# Altium PCB PCB1.PcbDoc (part 1 of 2)
Units mil, origin at the board's own origin, x right, y up, seen from the top; angles counter-clockwise.
Board outline 3040.49 x 3282.62 mil, 2 copper layers (Top Layer, Bottom Layer); 59 components, 123 nets, 376 pads, 176 vias.
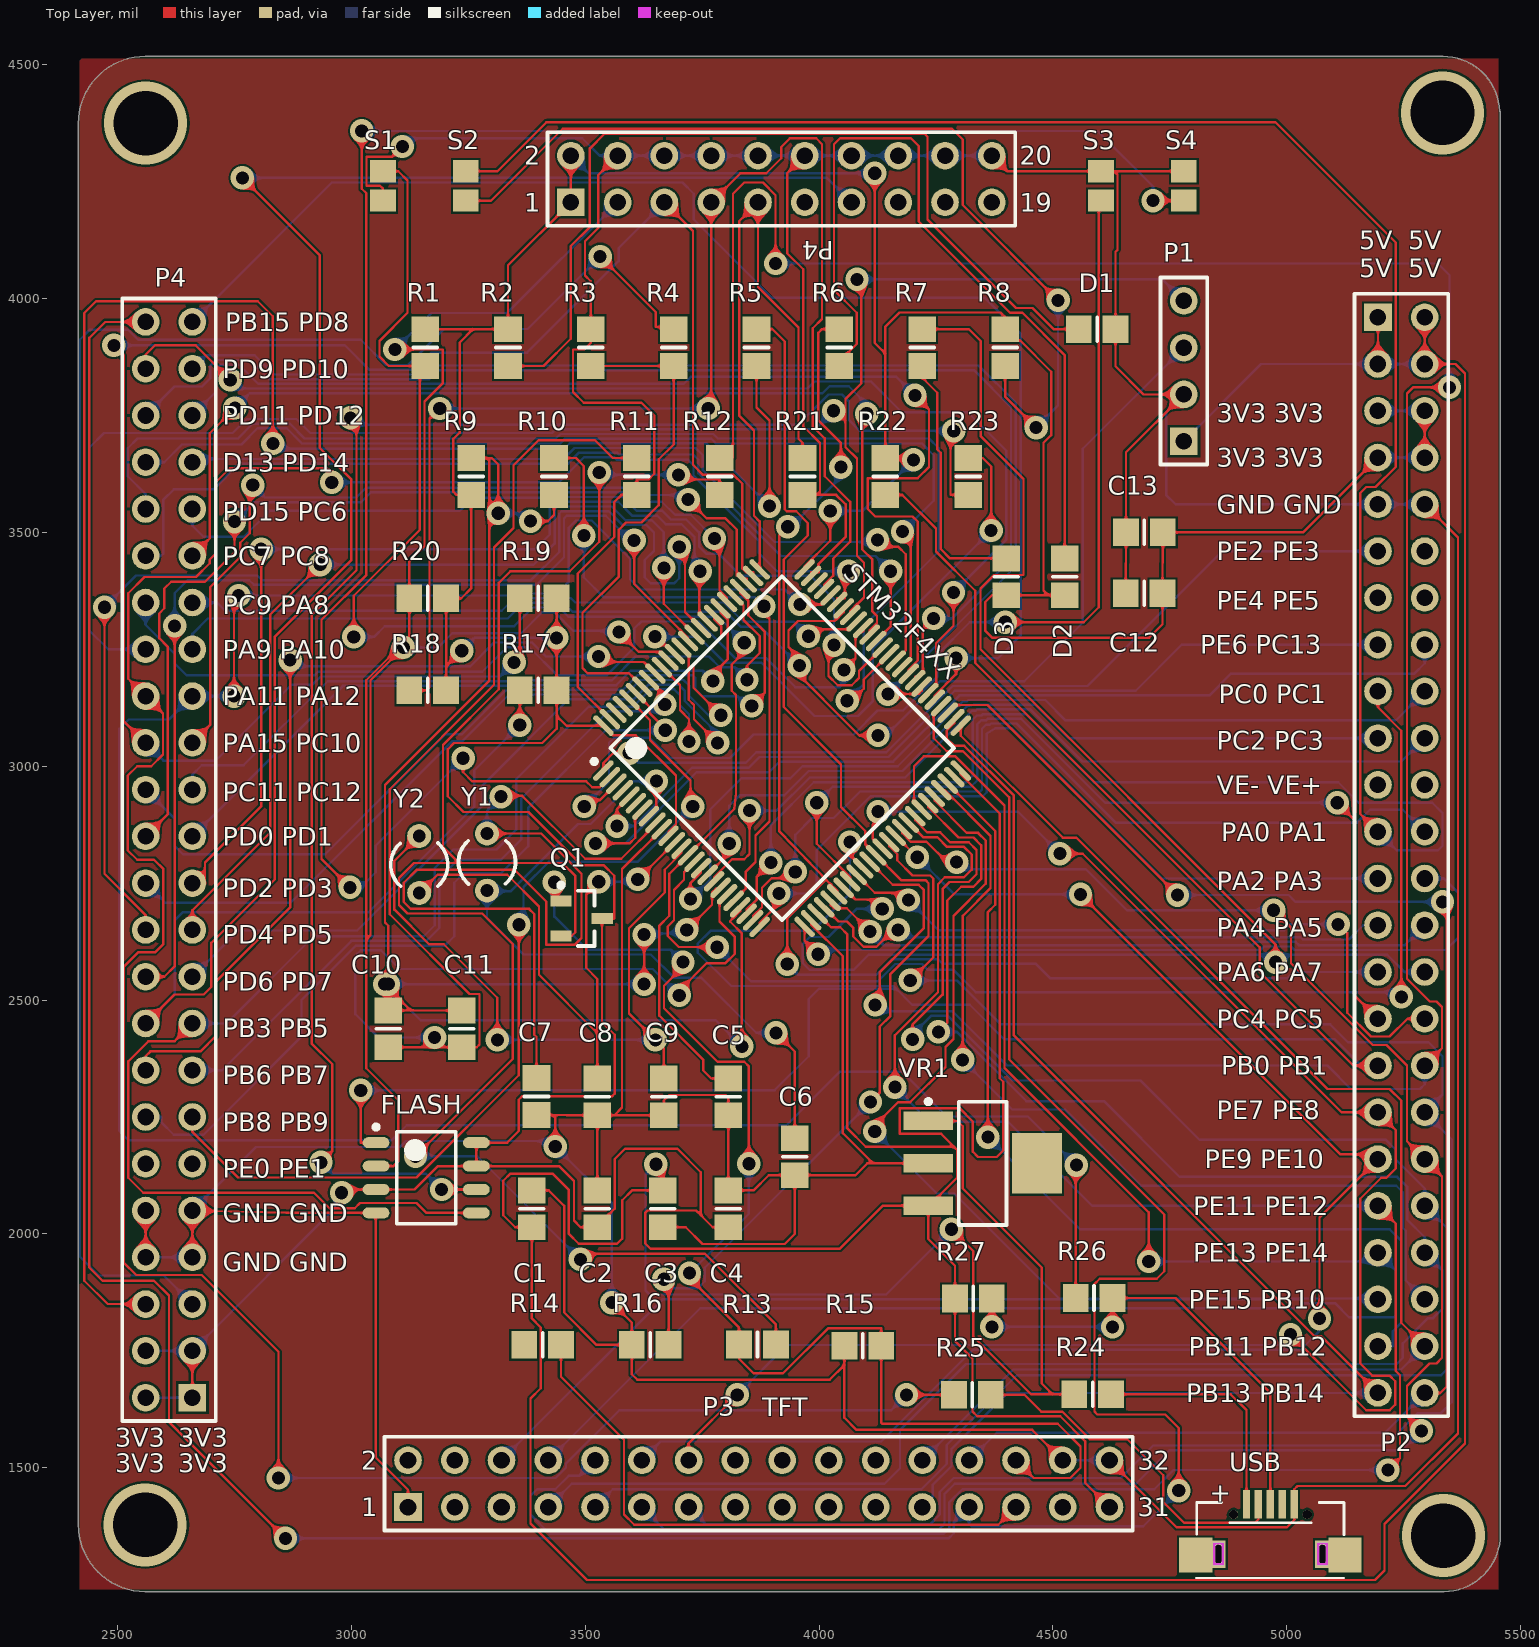
[diagram p0: Top Layer view]
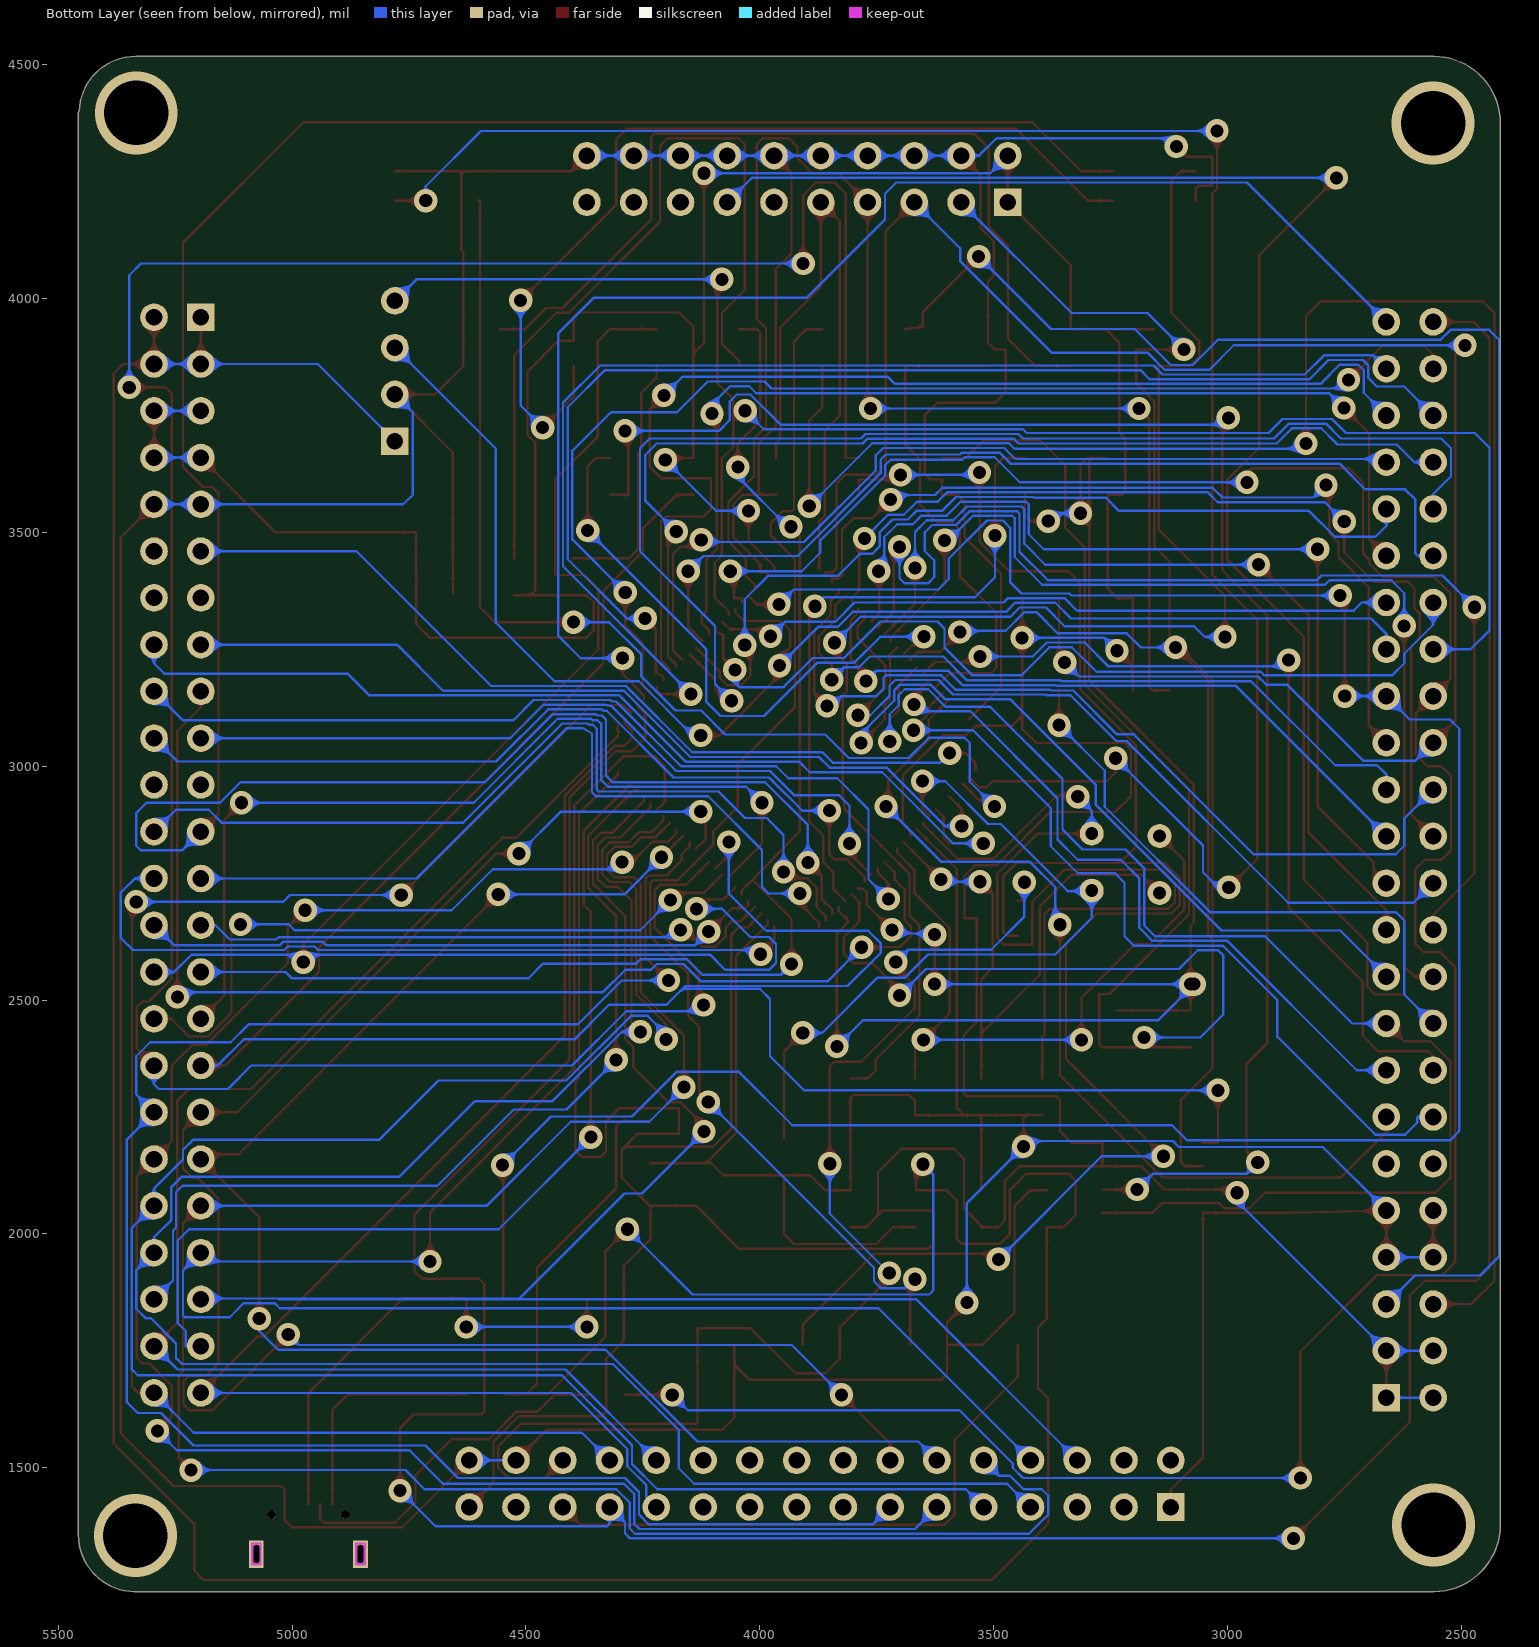
[diagram p1: Bottom Layer view, seen from below]

## Layer stack, top to bottom
Top Solder: solder mask 0.4, Solder Resist, Dk 3.5
Top Layer: signal copper 1.4
Dielectric 1: dielectric 12.6, FR-4, Dk 4.8
Bottom Layer: signal copper 1.4
Bottom Solder: solder mask 0.4, Solder Resist, Dk 3.5

## Board outline
2416.27,1377.95 ccw(c2559.06,1377.95) 2558.97,1235.17 ccw(c2559.06,1377.95) 2559.06,1235.17 2559.06,1235.16 5336,1235.16 ccw(c5336,1240.18) 5336.27,1235.17 ccw(c5335,1356.92) 5456.76,1356.92 ccw(c5451.74,1356.92) 5456.76,1356.96 ccw(c5451.74,1357) 5456.76,1357 5456.76,4397 ccw(c5451.74,4397) 5454.98,4400.83 ccw(c5334.26,4397) 5334.26,4517.79 ccw(c5334.26,4512.77) 5334.22,4517.79 2559.06,4517.79 cw(c2559.06,4512.77) 2559.09,4517.79 2559.06,4517.79 ccw(c2559.06,4375) 2416.27,4375 ccw(c2421.28,4375) 2416.27,4374.9

## Design rules (kind name [scope] priority, off if disabled: settings)
Clearance [All] p1: gap=5
PolygonConnect [All] p1: connectstyle=Relief reliefconductorwidth=10 reliefentries=4 polygonreliefangle="90 Angle" airgapwidth=10
RoutingVias [All] p1: holewidth=28 width=50 viastyle="Through Hole" minholewidth=28 minwidth=50 maxholewidth=28 maxwidth=50
ShortCircuit [All] p1: allowed=TRUE
SolderMaskExpansion [All] p1: expansion=4
Width [All] p1: maxlimit=6 minlimit=4 preferedwidth=5
29 further rules are at their usual default settings.

## Components (designator, comment, footprint, x,y, rotation, side; value= is the part's Value field where it differs from the comment)
C1 "Cap Pol2" 6-0805_M 3385.91,2053.74 r90 top
C2 "Cap Pol2" 6-0805_M 3525.91,2053.74 r90 top
C3 "Cap" 6-0805_M 3665.91,2053.74 r90 top
C4 "Cap" 6-0805_M 3805.91,2053.74 r90 top
C5 "Cap" 6-0805_M 3806,2293 r90 top
C6 "Cap" 6-0805_M 3948,2165 r90 top
C7 "Cap" 6-0805_M 3395.91,2293.74 r90 top
C8 "Cap" 6-0805_M 3525.91,2293.11 r90 top
C9 "Cap" 6-0805_M 3668,2293 r90 top
C10 "Cap" 6-0805_M 3078.86,2438.5 r90 top
C11 "Cap" 6-0805_M 3236.34,2438.5 r90 top
C12 "Cap" 6-0805_M 4695,3370 r0 top
C13 "Cap" 6-0805_M 4695.63,3500 r0 top
D1 "LED" 6-0805_M 4594.61,3934.57 r0 top
D2 "LED" 6-0805_M 4525,3405 r90 top
D3 "LED" 6-0805_M 4400,3405 r90 top
FLASH "Component2" W25Q16 3160,2120 r0 top (schematic designator W25Q16)
P1 "ISP_COM" HDR1X4 4780,3695 r90 top
P2 "Header 24X2" HDR2X24 5195,3960 r270 top
P3 "Header 16X2" HDR2X16 3121,1416 r0 top
P4 "Header 24X2" HDR2X24 2660,1650 r90 top
P4 "Header 10X2" HDR2X10 3469.37,4205.59 r0 top
Q1 "PNP" SOT-23B_N 3492.24,2674.72 r0 top
R1 "Res2" 6-0805_M 3157.6,3895.2 r90 top
R2 "Res2" 6-0805_M 3334.76,3895.2 r90 top
R3 "Res2" 6-0805_M 3511.93,3895.2 r90 top
R4 "Res2" 6-0805_M 3689.09,3895.2 r90 top
R5 "Res2" 6-0805_M 3866.26,3895.2 r90 top
R6 "Res2" 6-0805_M 4043.43,3895.2 r90 top
R7 "Res2" 6-0805_M 4220.59,3895.2 r90 top
R8 "Res2" 6-0805_M 4397.76,3895.2 r90 top
R9 "Res2" 6-0805_M 3256.02,3619.61 r90 top
R10 "Res2" 6-0805_M 3433.19,3619.61 r90 top
R11 "Res2" 6-0805_M 3610.35,3619.61 r90 top
R12 "Res2" 6-0805_M 3787.52,3619.61 r90 top
R13 "Res2" 6-0805_M 3868.26,1763.65 r0 top
R14 "Res2" 6-0805_M 3408.91,1762.74 r0 top
R15 "Res2" 6-0805_M 4093.54,1760.74 r0 top
R16 "Res2" 6-0805_M 3638.91,1762.74 r0 top
R17 "Res2" 6-0805_M 3399.45,3162.17 r0 top
R18 "Res2" 6-0805_M 3163.23,3162.17 r0 top
R19 "Res2" 6-0805_M 3399.45,3359.02 r0 top
R20 "Res2" 6-0805_M 3163.23,3359.02 r0 top
R21 "Res2" 6-0805_M 3964.68,3619.61 r90 top
R22 "Res2" 6-0805_M 4141.85,3619.61 r90 top
R23 "Res2" 6-0805_M 4319.02,3619.61 r90 top
R24 "Res2" 6-0805_M 4585,1657 r0 top
R25 "Res2" 6-0805_M 4327.63,1656 r0 top
R26 "Res2" 6-0805_M 4588,1863 r0 top
R27 "Res2" 6-0805_M 4330,1862 r0 top
S1 "SW-PB" 2029 3067.32,4240.75 r90 top
S2 "SW-PB" 2029 3244.49,4240.75 r90 top
S3 "SW-PB" 2029 4602.76,4240.75 r90 top
S4 "SW-PB" 2029 4779.92,4240.75 r90 top
STM32F4XX "Component1" STM32F4XX 3920.91,3038.74 r45 top
USB "Component_1" USB 4960,1380 r0 top
VR1 "AMS1117-3.3V" SOT223_M 4349.72,2151 r0 top
Y1 "XTAL" R38 3290,2795 r0 top
Y2 "XTAL" R38 3145,2790 r0 top

## Footprints (in the part's own frame and the unit in brackets; to place one, negate y for a bottom-side part, rotate by r counter-clockwise, add the part's x,y. Pads: shape width x height; smd on the part's side, far side on the other; paste and mask are expansions set on the pad)
6-0805_M [mm] "Chip Resistor, Body 2.0x1.2mm, IPC Low Density"
  rect 1.4x1.5 smd: 1(-1,0) 2(1,0)
  silkscreen extent 0,-0.65 0,0.65, body extent -1.07,-0.7 1.07,0.7, height 0.7
2029 [mm] "Chip Inductor, Body 2.0x1.2mm, IPC High Density"
  rect 1.2x1.4 smd: 1(-0.8,0) 2(0.8,0)
  body extent -1.1,-0.7 1.1,0.7, height 0.55
HDR1X4 [mm] "Connector; Header; 4 Position"
  rect 1.5x1.5 hole 0.9: 1(0,0)
  round 1.5 hole 0.9: 2(2.54,0) 3(5.08,0) 4(7.62,0)
  silkscreen extent -1.27,-1.27 8.89,1.27
HDR2X10 [mm] "Connector; Header; 10x2 Position"
  rect 1.5x1.5 hole 0.9: 1(0,0)
  round 1.5 hole 0.9: 2(0,2.54) 3(2.54,0) 4(2.54,2.54) 5(5.08,0) 6(5.08,2.54) 7(7.62,0) 8(7.62,2.54) 9(10.16,0) 10(10.16,2.54) 11(12.7,0) 12(12.7,2.54) 13(15.24,0) 14(15.24,2.54) 15(17.78,0) 16(17.78,2.54) 17(20.32,0) 18(20.32,2.54) 19(22.86,0) 20(22.86,2.54)
  silkscreen extent -1.27,-1.27 24.13,3.81
HDR2X16 [mm] "Connector; Header; 16x2 Position"
  rect 1.5x1.5 hole 0.9: 1(0,0)
  round 1.5 hole 0.9: 2(0,2.54) 3(2.54,0) 4(2.54,2.54) 5(5.08,0) 6(5.08,2.54) 7(7.62,0) 8(7.62,2.54) 9(10.16,0) 10(10.16,2.54) 11(12.7,0) 12(12.7,2.54) 13(15.24,0) 14(15.24,2.54) 15(17.78,0) 16(17.78,2.54) 17(20.32,0) 18(20.32,2.54) 19(22.86,0) 20(22.86,2.54) 21(25.4,0) 22(25.4,2.54) 23(27.94,0) 24(27.94,2.54) 25(30.48,0) 26(30.48,2.54) 27(33.02,0) 28(33.02,2.54) 29(35.56,0) 30(35.56,2.54) 31(38.1,0) 32(38.1,2.54)
  silkscreen extent -1.27,-1.27 39.37,3.81
HDR2X24 [mm] "Connector; Header; 24x2 Position"
  rect 1.5x1.5 hole 0.9: 1(0,0)
  round 1.5 hole 0.9: 2(0,2.54) 3(2.54,0) 4(2.54,2.54) 5(5.08,0) 6(5.08,2.54) 7(7.62,0) 8(7.62,2.54) 9(10.16,0) 10(10.16,2.54) 11(12.7,0) 12(12.7,2.54) 13(15.24,0) 14(15.24,2.54) 15(17.78,0) 16(17.78,2.54) 17(20.32,0) 18(20.32,2.54) 19(22.86,0) 20(22.86,2.54) 21(25.4,0) 22(25.4,2.54) 23(27.94,0) 24(27.94,2.54) 25(30.48,0) 26(30.48,2.54) 27(33.02,0) 28(33.02,2.54) 29(35.56,0) 30(35.56,2.54) 31(38.1,0) 32(38.1,2.54) 33(40.64,0) 34(40.64,2.54) 35(43.18,0) 36(43.18,2.54) 37(45.72,0) 38(45.72,2.54) 39(48.26,0) 40(48.26,2.54) 41(50.8,0) 42(50.8,2.54) 43(53.34,0) 44(53.34,2.54) 45(55.88,0) 46(55.88,2.54) 47(58.42,0) 48(58.42,2.54)
  silkscreen extent -1.27,-1.27 59.69,3.81
R38 [mm] "Crystal, Thru-Hole; 2 Leads; Body 3.1 x 8.2 mm (Dia.xH)"
  round 1.3 hole 0.7: 1(0,1.55) 2(0,-1.55)
  silkscreen extent -1.55,-1.19 1.55,1.17
SOT223_M [mm] "SOT223, 4-Leads, Body 6.5x3.5mm, Pitch 2.3mm, Lead Span 7mm, IPC Low Density"
  rect 2.7x1 smd: 1(-2.95,2.3) 2(-2.95,0) 3(-2.95,-2.3)
  rect 2.7x3.3 smd: 4(2.95,0)
  silkscreen extent -3.07,-3.35 1.3,3.47, body extent -1.85,-3.35 1.85,3.35, height 1.7
SOT-23B_N [mm] "SOT23, 3-Leads, Body 2.9x1.3mm, Pitch 0.95mm, Lead Span 2.4mm, IPC Medium Density"
  rect 1.15x0.6 smd: 1(-1.125,0.95) 2(-1.125,-0.95) 3(1.125,0)
  silkscreen extent -1.25,-1.5 0.7,1.92, body extent -0.7,-1.5 0.7,1.5, height 1.14
STM32F4XX [mm] "TSQFP, 100-Leads, Body 14.00x14.00mm, Pitch 0.50mm, IPC Medium Density"
  oval 1.45x0.3 smd: 1(-7.725,6) 2(-7.725,5.5) 3(-7.725,5) 4(-7.725,4.5) 5(-7.725,4) 6(-7.725,3.5) 7(-7.725,3) 8(-7.725,2.5) 9(-7.725,2) 10(-7.725,1.5) 11(-7.725,1) 12(-7.725,0.5) 13(-7.725,0) 14(-7.725,-0.5) 15(-7.725,-1) 16(-7.725,-1.5) 17(-7.725,-2) 18(-7.725,-2.5) 19(-7.725,-3) 20(-7.725,-3.5) 21(-7.725,-4) 22(-7.725,-4.5) 23(-7.725,-5) 24(-7.725,-5.5) 25(-7.725,-6) 51(7.725,-6) 52(7.725,-5.5) 53(7.725,-5) 54(7.725,-4.5) 55(7.725,-4) 56(7.725,-3.5) 57(7.725,-3) 58(7.725,-2.5) 59(7.725,-2) 60(7.725,-1.5) 61(7.725,-1) 62(7.725,-0.5) 63(7.725,0) 64(7.725,0.5) 65(7.725,1) 66(7.725,1.5) 67(7.725,2) 68(7.725,2.5) 69(7.725,3) 70(7.725,3.5) 71(7.725,4) 72(7.725,4.5) 73(7.725,5) 74(7.725,5.5) 75(7.725,6)
  oval 0.3x1.45 smd: 26(-6,-7.725) 27(-5.5,-7.725) 28(-5,-7.725) 29(-4.5,-7.725) 30(-4,-7.725) 31(-3.5,-7.725) 32(-3,-7.725) 33(-2.5,-7.725) 34(-2,-7.725) 35(-1.5,-7.725) 36(-1,-7.725) 37(-0.5,-7.725) 38(0,-7.725) 39(0.5,-7.725) 40(1,-7.725) 41(1.5,-7.725) 42(2,-7.725) 43(2.5,-7.725) 44(3,-7.725) 45(3.5,-7.725) 46(4,-7.725) 47(4.5,-7.725) 48(5,-7.725) 49(5.5,-7.725) 50(6,-7.725) 76(6,7.725) 77(5.5,7.725) 78(5,7.725) 79(4.5,7.725) 80(4,7.725) 81(3.5,7.725) 82(3,7.725) 83(2.5,7.725) 84(2,7.725) 85(1.5,7.725) 86(1,7.725) 87(0.5,7.725) 88(0,7.725) 89(-0.5,7.725) 90(-1,7.725) 91(-1.5,7.725) 92(-2,7.725) 93(-2.5,7.725) 94(-3,7.725) 95(-3.5,7.725) 96(-4,7.725) 97(-4.5,7.725) 98(-5,7.725) 99(-5.5,7.725) 100(-6,7.725)
  silkscreen extent -7.85,-6.6 6.6,6.82, body extent -7,-7 7,7, height 1.6
USB [mm]
  rect 0.4x1.55 smd: 1(-1.173,1.057) 2(-0.523,1.057) 3(0.127,1.057) 4(0.777,1.057) 5(1.427,1.057)
  rect 1.8x1.9 smd: 6(-3.923,-1.693) 6(4.177,-1.693)
  rect 0.8x1.5 hole 0.4 slot 1 at 90 deg: 6(-2.698,-1.643) 6(2.952,-1.643)
  round 0.5 hole 0.5 unplated: ""(-1.873,0.507) ""(2.127,0.507)
  Keep-Out Layer lines w0.127: -2.927,-2.186 -2.469,-2.186 -2.469,-1.068 -2.927,-1.068 -2.927,-2.186 ; 2.723,-2.186 3.181,-2.186 3.181,-1.068 2.723,-1.068 2.723,-2.186
  silkscreen extent -3.92,-2.94 4.13,1.16
W25Q16 [mm] "SOIC, 8-Leads, Body 4.90x3.90mm, Pitch 1.27mm, IPC Medium Density"
  oval 1.45x0.6 smd: 1(-2.725,1.905) 2(-2.725,0.635) 3(-2.725,-0.635) 4(-2.725,-1.905) 5(2.725,-1.905) 6(2.725,-0.635) 7(2.725,0.635) 8(2.725,1.905)
  silkscreen extent -2.85,-2.5 1.6,2.88, body extent -2,-2.5 2,2.5, height 1.75

## Part data
C1 C2: "Polarized Capacitor (Axial)"
C3 C4 C5 C6 C7 C8 C9 C10 C11 C12 C13: "Capacitor"
D1 D2 D3: library part LED0, "Typical INFRARED GaAs LED"
P1: library part "Header 4", "Header, 4-Pin"
P2 P4: "Header, 24-Pin, Dual row"
P3: "Header, 16-Pin, Dual row"
P4: "Header, 10-Pin, Dual row"
Q1: "PNP Bipolar Transistor"
R1 R2 R3 R4 R5 R6 R7 R8 R9 R10 R11 R12 R13 R14 R15 R16 R17 R18 R19 R20 R21 R22 R23 R24 R25 R26 R27: "Resistor"
S1 S2 S3 S4: "Switch"
VR1: library part "Volt Reg", "Voltage Regulator"
Y1 Y2: "Crystal Oscillator"

## Via types
v1: diameter 50, hole 28, Top Layer to Bottom Layer, 172 vias
v2: diameter 177.17, hole 137.8, Top Layer to Bottom Layer, 4 vias

## Nets (pads, with @x,y where several pads share a name; then routed paths per layer and width w, separated by ;. In a path a pad name is that pad's centre, name@x,y a point inside that pad or via, vN(x,y) a via of type N, cw(c..) or ccw(c..) an arc to the next point about the centre after c; other vN are vias at no path point)
3V3: C2.1 C4.1 C12.2 C13.2 D2.1 D3.1 FLASH.3 FLASH.7 FLASH.8 P2.5 P2.6 P2.7 P2.8 P3.31 P4.1 P4.2 P4.3@2660,1750 P4.4@2560,1750 Q1.3 R1.2 R2.2 R8.2 R9.1 R17.2 R18.2 R19.2 R20.2 R22.2 R27.1 STM32F4XX.11 STM32F4XX.28 STM32F4XX.50 STM32F4XX.75 STM32F4XX.100 VR1.3 | length 14497.4
  Top Layer w5: P4.1@2660,1650 P4.3@2660,1750 ; v1(2979,2088) 2986,2095 FLASH.3@3052.72,2095 3135,2095 3185,2145 FLASH.7@3267.28,2145 ; R1.2@3157.6,3934.57 3260,3934.57 ; R18.2@3202.6,3162.17 3202.6,3213.6 ; v1(3236,3247) 3202.6,3213.6 ; R19.2@3438.82,3359.02 v1(3438.82,3274.5) R17.2@3438.82,3162.17 3438.82,3107.94 ; P4.2@3469.37,4305.59 P4.1@3469.37,4205.59 3334.76,4070.98 R2.2@3334.76,3934.57 3260,3934.57 ; STM32F4XX.11@3678.01,2851.52 3678.01,2860 3694,2875.99 3694,2980 3608,3066 3559.58,3066 STM32F4XX.100@3538.82,3086.76 3460,3086.76 3438.82,3107.94 ; C4.1@3805.91,2014.37 3772.63,2014.37 3747,2040 ; STM32F4XX.75@3968.93,3420.83 3968.93,3426.93 4024,3482 v1(4024,3546) ; STM32F4XX.28@3996.77,2684.49 4025.67,2655.59 4045.41,2655.59 4060.5,2640.5 4060.5,2225.5 4099.74,2186.26 4288.74,2186.26 ; v1(4119,4268) 4119,3904.85 4141.85,3882 ; v1(4202,3655) 4198.02,3658.98 R22.2@4141.85,3658.98 4141.85,3882 ; STM32F4XX.50@4302.99,2990.72 4302.99,2982.17 4386.5,2898.67 4386.5,2332.81 4394,2325.31 4394,2178.5 4380,2164.5 4340,2164.5 4328.5,2176 4328.5,2240.5 4300,2269 4172.5,2269 4172.5,2214 4261,2214 4288.74,2186.26 ; D2.1@4525,3365.63 4490,3365.63 ; P3.31@4621,1416 4569.31,1467.69 4569.31,1556.39 4515.73,1609.97 4338.03,1609.97 4328,1620 4328,1733.63 4290.63,1771 R27.1@4290.63,1862 4290.63,1932 4233.57,1989.06 VR1.3@4233.57,2060.45 ; P2.7@5195,3660 5035,3500 C13.2@4735,3500 4735,3434.63 4734.37,3434 C12.2@4734.37,3370 4734.37,3303.37 4706,3275 4370,3275 4355,3290 4355,3350.63 4370,3365.63 D3.1@4400,3365.63 4490,3365.63 ; P2.8@5295,3660 P2.6@5295,3760 ; 3202.6,3213.6 R20.2@3202.6,3359.02 3235.04,3359.02 3256.02,3380 R9.1@3256.02,3580.24 3225,3580.24 3218,3587.24 3218,3699.88 3231.5,3713.38 3231.5,3906.07 3260,3934.57 ; FLASH.7@3267.28,2145 3444,2145 3476,2113 3476,2028.37 3490,2014.37 C2.1@3525.91,2014.37 3525.91,2017 3563,2054.09 3563,2160 3585,2182 3697,2182 3747,2132 3747,2040 ; FLASH.7@3267.28,2145 FLASH.8@3267.28,2195 3333,2195 3358,2220 3358,2287 3365,2294 3557,2294 3563,2300 3563,2426 3536,2453 3536,2674.72 Q1.3@3536.54,2674.72 3562,2674.72 3562,2766 3540,2788 3493,2788 3379,2902 3240,2902 3206,2936 3206,3036 3219.5,3049.5 3408.32,3049.5 3438.82,3080 3438.82,3107.94 ; 3747,2040 3737,2050 3633,2050 3628,2045 3628,1980 3640,1968 4044,1968 4136.45,2060.45 VR1.3@4233.57,2060.45 ; 4141.85,3882 4141.85,3940 4171.85,3970 4387.76,3970 4397.76,3960 R8.2@4397.76,3934.57 4397.76,3910 4430,3910 4496.5,3843.5 4496.5,3708 4480,3691.5 4480,3375.63 4490,3365.63 ; VR1.3@4233.57,2060.45 4235.45,2060.45 4295,2120 4295,2180 4288.74,2186.26
  Bottom Layer w5: P4.2@2560,1650 P4.1@2660,1650 ; P4.4@2560,1750 P4.3@2660,1750 2979,2069 v1(2979,2088) ; v1(3236,3247) 3263.5,3274.5 v1(3438.82,3274.5) ; P4.2@3469.37,4305.59 3506.96,4268 v1(4119,4268) ; v1(4024,3546) 4093,3546 v1(4202,3655) ; P2.7@5195,3660 P2.8@5295,3660 ; P2.5@5195,3760 P2.6@5295,3760
5V: C1.1 C3.2 P1.1 P2.1 P2.2 P2.3 P2.4 R24.1 VR1.1 | length 9052.7
  Top Layer w5: v1(3651,2149) 3665.91,2134.09 C3.2@3665.91,2093.11 3600,2093.11 3579,2072.11 3579,1990 3568,1979 3486,1979 3465,2000 3465,2094 3430,2129 3340,2129 3324.63,2113.63 3324.63,2040 3350.26,2014.37 C1.1@3385.91,2014.37 3385.91,1819.09 3405,1800 3405,1670 3383,1648 3383,1381 3504,1260 5189,1260 5209,1280 5209,1380 5381,1552 5381,3840 5361,3860 P2.4@5295,3860 P2.2@5295,3960 ; VR1.1@4233.57,2241.55 4295.45,2241.55 4307,2230 4307,2097 4476,1928 4476,1680 4499,1657 ; v1(4283,2010) 4330,1963 4330,1780 4453,1657 4499,1657 ; R24.1@4545.63,1657 4499,1657 ; P2.3@5195,3860 P2.1@5195,3960
  Bottom Layer w5: v1(3651,2149) 3629,2127 3629,1879 3637.5,1870.5 4143.5,1870.5 v1(4283,2010) ; P1.1@4780,3695 4945,3860 P2.3@5195,3860 P2.4@5295,3860
BOOT0: R3.1 R4.1 STM32F4XX.94 | length 1067.6
  Top Layer w5: R3.1@3511.93,3855.83 R4.1@3689.09,3855.83 3689.09,3688.09 3657.38,3656.38 3657.38,3558.38 3620,3521 3587.48,3521 3571.98,3505.5 3571.98,3405.98 3494,3328 3494,3210 3505,3199 3593.61,3199 STM32F4XX.94@3622.33,3170.28
EP5: STM32F4XX.4
F_CS: FLASH.1 P2.33 R22.1 STM32F4XX.35 | length 5289.7
  Top Layer w5: v1(3020,2307) 3020,2195 FLASH.1@3052.72,2195 ; v1(4066,2838) 4064.13,2838 4056.13,2830 4056.13,2820 STM32F4XX.35@4094.2,2781.93 ; R22.1@4141.85,3580.24 4177.76,3580.24 4250,3508 4250,3459 4334,3375 4334,3221 4942.35,2612.65 4942.35,2560 5142.35,2360 P2.33@5195,2360
  Bottom Layer w5: v1(3020,2307) 3905,2307 3978,2380 3978,2502 4000,2524 4165,2524 ; v1(4066,2838) 4066,2728 3986,2648 3768,2648 3740.8,2620.8 3740.8,2601.34 3812.14,2530 4159,2530 4165,2524 ; P2.33@5195,2360 5159,2360 5103,2416 4396,2416 4322,2490 4199,2490 4165,2524
FSMC_A18: P3.21
FSMC_D0: P3.18
FSMC_D1: P3.17
FSMC_D2: P3.16
FSMC_D3: P3.15
FSMC_D4: P2.35 P3.14 STM32F4XX.38 | length 3875
  Top Layer w5: P3.14@3721,1516 3721,1552 v1(3825,1656) ; v1(4126,2903) 4126,2886 4115,2875 4115,2844.65 STM32F4XX.38@4135.96,2823.69 ; v1(4515,2813) 4564,2813 5117,2260 P2.35@5195,2260 5233,2222 5233,2140 5213,2120 5202,2120 5157,2075 5157,1723 5182.97,1697.03 5220,1697.03 5232.03,1685 5232.03,1635 5220,1622.97 5170.03,1622.97 v1(5008,1785)
  Bottom Layer w5: v1(3825,1656) 3931.5,1762.5 4985.5,1762.5 v1(5008,1785) ; v1(4126,2903) 4425,2903 v1(4515,2813)
FSMC_D5: P2.36 P3.13 STM32F4XX.39 | length 4145.9
  Top Layer w5: STM32F4XX.39@4149.88,2837.6 4149.88,2828.73 4167,2811.61 4167,2799 4199.5,2766.5 4237.63,2766.5 4244.13,2760 4244.13,2591.13 v1(4195,2542)
  Bottom Layer w5: P3.13@3721,1416 3758.03,1378.97 4237,1378.97 4258.03,1400 4258.03,1448.17 4287.86,1478 4645,1478 4714.56,1547.56 5210.56,1547.56 5280,1617 5330,1617 5353,1640 5353,2202 P2.36@5295,2260 5333,2298 5333,2380 5303,2410 5131,2410 5093,2448 4388.88,2448 4294.88,2542 v1(4195,2542)
FSMC_D6: P2.37 P3.12 STM32F4XX.40 | length 3306.4
  Top Layer w5: STM32F4XX.40@4163.8,2851.52 v1(4210,2805.32) ; v1(4559,2726) 5115,2170 5195,2170 P2.37@5195,2160 5070,2035 v1(5070,1819)
  Bottom Layer w5: P3.12@3621,1516 3661,1556 4133,1556 4329.38,1752.38 5030,1752.38 5070,1792.38 v1(5070,1819) ; v1(4210,2805.32) 4289.32,2726 v1(4559,2726)
FSMC_D7: P2.38 P3.11 STM32F4XX.41 | length 4014.2
  Top Layer w5: STM32F4XX.41@4177.72,2865.44 4177.72,2856.57 4195.79,2838.5 4229.74,2838.5 4273.24,2795 v1(4294,2795) ; v1(4972,2692) 5009,2655 5009,2578.86 5183.86,2404 5213,2404 5257,2360 5257,2198 P2.38@5295,2160 5332.03,2122.97 5332.03,1735.03 5320,1723 5305,1723 5257,1675 5257,1610 v1(5288,1579)
  Bottom Layer w5: P3.11@3621,1416 3668.03,1368.97 4257,1368.97 4268.03,1380 4268.03,1444.03 4290,1466 4677.41,1466 4748.97,1537.56 5246.56,1537.56 v1(5288,1579) ; v1(4294,2795) 4309.46,2779.54 4570.71,2779.54 4658.25,2692 v1(4972,2692)
FSMC_D8: P2.39 P3.10 STM32F4XX.42 | length 4634.2
  Top Layer w5: v1(4162,2314) 4162,2424.5 4254.13,2516.63 4254.13,2747.8 4268.83,2762.5 4310,2762.5 4326.5,2779 4326.5,2811 4310,2827.5 4273.5,2827.5 4252.5,2848.5 4222.5,2848.5 STM32F4XX.42@4191.64,2879.36 ; P2.39@5195,2060 5233,2022 5233,1707.03 5242.03,1698 5242.03,1521.03 v1(5216.06,1495.06)
  Bottom Layer w5: P3.10@3521,1516 3488,1483 3465,1483 3436,1454 3397,1454 3383,1440 3383,1400 3424.03,1358.97 4267,1358.97 4278.03,1370 4278.03,1425.49 4306.54,1454 4716.47,1454 4757.53,1495.06 v1(5216.06,1495.06) ; v1(4162,2314) 4236,2240 4404,2240 4584,2060 P2.39@5195,2060
FSMC_D9: P2.40 P3.9 STM32F4XX.43 | length 4313
  Top Layer w5: v1(4200,2416) 4200,2447.5 4264.13,2511.63 4264.13,2737.8 4278.83,2752.5 4320,2752.5 4336.5,2769 4336.5,2821 4320,2837.5 4280.04,2837.5 4259.04,2858.5 4231.46,2858.5 4205.56,2884.4 STM32F4XX.43@4205.56,2893.28
  Bottom Layer w5: P3.9@3521,1416 3559,1454 4219,1454 4273,1508 4273,1548.46 4422.54,1698 5330,1698 5343,1711 5343,2012 P2.40@5295,2060 5295,2097 5233,2159 5233,2180 5212,2201 4814,2201 4687,2328 4413.61,2328 4275.36,2466.25 4239.25,2466.25 4200,2427 v1(4200,2416)
FSMC_D10: P2.41 P3.8 STM32F4XX.44 | length 4072.2
  Top Layer w5: STM32F4XX.44@4219.48,2907.2 4203,2923.68 4203,3000 4224,3021 4291.67,3021 4396.5,2916.17 4396.5,2354.5 4705,2046 v1(4705,1941)
  Bottom Layer w5: P3.8@3421,1516 3745.89,1840.89 5026.36,1840.89 5037.5,1852.03 5102.97,1852.03 5132.97,1822.03 5229.03,1822.03 5233,1826 5233,1922 P2.41@5195,1960 5195,1941 v1(4705,1941)
FSMC_D11: P2.42 P3.7 STM32F4XX.45 | length 4193.2
  Top Layer w5: STM32F4XX.45@4233.4,2921.12 4233.4,2912.25 4298.14,2847.5 4330,2847.5 4346.5,2831 4346.5,2759 4330,2742.5 4303.83,2742.5 4274.13,2712.8 4274.13,2451.13 v1(4255,2432)
  Bottom Layer w5: P3.7@3421,1416 3471,1466 4140,1466 4173,1499 4173,1581 4314,1722 5235,1722 5248,1735 5248,1766 5302,1820 5313,1820 5333,1840 5333,1922 P2.42@5295,1960 5295,1993 5257.97,2030.03 5257.97,2100 5235.97,2122 4771,2122 4609,2284 4443,2284 4295,2432 v1(4255,2432)
FSMC_D12: P2.43 P3.6 STM32F4XX.46 | length 3965.8
  Top Layer w5: v1(4119,2219) 4119,2231.5 4169,2281.5 4194.71,2281.5 4270.25,2357.04 4270.25,2399.5 4287.5,2416.75 4287.5,2680 4356.5,2749 4356.5,2841 4340,2857.5 4315.98,2857.5 4247.32,2926.16 STM32F4XX.46@4247.32,2935.04
  Bottom Layer w5: P3.6@3321,1516 3665,1860 5027.97,1860 5030,1862.03 ; v1(4119,2219) 4251.48,2086.52 4289.24,2086.52 4513.73,1862.03 5030,1862.03 ; P2.43@5195,1860 5192.97,1862.03 5030,1862.03
FSMC_D13: P3.5
FSMC_D14: P3.4
FSMC_D15: P3.3
FSMC_NE1: P3.22
FSMC_NOE: P3.19
FSMC_NWE: P3.20
GND: C1.2 C2.2 C3.1 C4.2 C5.1 C6.1 C7.1 C8.1 C9.1 C12.1 C13.1 D1.2 FLASH.4 P1.2 P2.9 P2.10 P3.1 P3.30 P3.32 P4.4@3569.37,4305.59 P4.6@3669.37,4305.59 P4.7@2660,1950 P4.8 P4.9@2660,2050 P4.10 P4.12@3969.37,4305.59 P4.14@4069.37,4305.59 P4.16@4169.37,4305.59 P4.18@4269.37,4305.59 P4.20@4369.37,4305.59 R3.2 R11.1 R15.1 R16.1 R21.1 S1.1 S3.2 S4.2 STM32F4XX.10 STM32F4XX.27 STM32F4XX.74 STM32F4XX.99 USB.5 VR1.2 | length 16818.6
  Top Layer w5: P4.8@2560,1950 P4.10@2560,2050 ; P4.7@2660,1950 P4.9@2660,2050 2861,2045 FLASH.4@3052,2045 ; FLASH.4@3052.72,2045 FLASH.4@3052,2045 ; S1.1@3067.32,4209.25 3067.32,4235 3061.2,4241.12 3032.26,4241.12 3032.26,4303.37 3087.37,4303.37 v1(3109,4325) ; P3.1@3121,1416 3121,1453 3052,1522 FLASH.4@3052,2045 ; C1.2@3385.91,2093.11 3421.89,2093.11 3455,2060 3455,1832 3524.26,1762.74 R16.1@3599.54,1762.74 ; C7.1@3395.91,2254.37 3430,2254.37 ; v1(3436,2187) 3436,2248.37 3430,2254.37 ; C2.2@3525.91,2093.11 C8.1@3525.91,2253.74 ; STM32F4XX.99@3552.74,3100.68 3484,3169.42 3484,3412 3561.98,3489.98 3561.98,3564.98 3577.24,3580.24 R11.1@3610.35,3580.24 3610.35,3613 3635,3613 3647.38,3625.38 3647.38,3749.62 3620,3777 3497,3777 3474,3800 3474,3891 3497.93,3891 3511.93,3905 R3.2@3511.93,3934.57 3511.93,4036.87 3499.4,4049.4 3499.4,4122.53 3528,4151.13 3528,4264.22 P4.4@3569.37,4305.59 ; v1(3557,1853) 3599.54,1810.46 R16.1@3599.54,1762.74 ; STM32F4XX.10@3664.09,2865.44 3578.75,2780.1 3578.75,2270 3562.49,2253.74 C8.1@3525.91,2253.74 ; C3.1@3665.91,2014.37 3715,2014.37 3750.87,1978.5 3926.5,1978.5 3948,2000 C6.1@3948,2125.63 ; R21.1@3964.69,3580.24 3995,3580.24 ; P4.12@3969.37,4305.59 3932,4268.22 3932,4096.5 3966,4062.5 3966,3727 4002,3691 4002,3587.24 3995,3580.24 ; STM32F4XX.27@3982.85,2670.57 3982.85,2661.7 4050.5,2594.04 4050.5,2215.5 4115,2151 ; STM32F4XX.74@3982.85,3406.91 3982.85,3415 3999,3415 3999,3432.5 4056.71,3490.21 4056.71,3560 4036.48,3580.24 3995,3580.24 ; R15.1@4054.17,1760.74 4054.17,1720 ; VR1.2@4233.57,2151 4115,2151 ; P4.20@4369.37,4305.59 4402.72,4272.24 S3.2@4602.76,4272.24 4630.76,4272.24 ; P3.30@4521,1516 4456,1581 4080,1581 4054.17,1606.83 4054.17,1720 ; P3.32@4621,1516 4764.38,1372.62 5000.62,1372.62 5016.18,1388.18 USB.5@5016.18,1421.61 5016.18,1454 5023.27,1461.08 5253.55,1461.08 5366,1573.54 5366,3489 P2.10@5295,3560 ; C12.1@4655.63,3370 4655.63,3434 4656.26,3434.63 C13.1@4656.26,3500 4656.26,3671.26 P1.2@4780,3795 4694,3795 4633.98,3855.02 D1.2@4633.98,3934.57 4633.98,4099.98 4638,4104 4638,4265 4630.76,4272.24 ; S4.2@4779.92,4272.24 4630.76,4272.24 ; 3430,2254.37 3460,2254.37 3460.63,2253.74 C8.1@3525.91,2253.74 ; C8.1@3525.91,2253.74 3596.11,2253.63 C9.1@3668,2253.63 3668,2285 3680,2297 3800,2297 3806,2291 C5.1@3806,2253.63 3806,2173.09 3805.91,2173 C4.2@3805.91,2093.11 3860,2093.11 3892.52,2125.63 C6.1@3948,2125.63 ; R16.1@3599.54,1762.74 3599.54,1700 3611.04,1688.5 4022.67,1688.5 4054.17,1720 ; C6.1@3948,2125.63 4078,2125.63 4103.37,2151 4115,2151
  Bottom Layer w5: P4.8@2560,1950 P4.7@2660,1950 ; P4.9@2660,2050 2796,2186 3104,2186 3116.5,2198.5 3424.5,2198.5 v1(3436,2187) 3557,2066 v1(3557,1853) ; v1(3109,4325) 3126.62,4342.62 3493.78,4342.62 3530.81,4305.59 P4.4@3569.37,4305.59 P4.6@3669.37,4305.59 P4.8@3769.37,4305.59 P4.10@3869.37,4305.59 P4.12@3969.37,4305.59 P4.14@4069.37,4305.59 P4.16@4169.37,4305.59 P4.18@4269.37,4305.59 P4.20@4369.37,4305.59 ; P3.30@4521,1516 P3.32@4621,1516 ; P1.2@4780,3795 4742,3757 4742,3580 4762,3560 P2.9@5195,3560 P2.10@5295,3560
KEY0: S3.1 STM32F4XX.3 | length 2351.6
  Top Layer w5: v1(3498,2914) 3512,2928 3531.78,2928 STM32F4XX.3@3566.66,2962.88 ; v1(4398,3308) 4566,3308 4598,3340 4598,4209.25 S3.1@4602.76,4209.25
  Bottom Layer w5: v1(3498,2914) 3551,2967 3551,3050 3562,3061 3638,3061 3681.5,3017.5 3809.5,3017.5 3860,3068 4074,3068 4125,3119 4180,3119 4253,3192 4253,3239 4322,3308 v1(4398,3308)
KEY1: S4.1 STM32F4XX.2 | length 4279.5
  Top Layer w5: v1(2997,2741) 2936.14,2801.86 2936.14,3313.14 3032,3409 3032,4225 3022.26,4234.74 v1(3022.26,4358.37) ; v1(3239,3017) 3239,2987 3258.01,2967.99 3501.95,2967.99 3514.94,2955 3530.94,2955 STM32F4XX.2@3552.74,2976.8 ; v1(4714,4209.25) S4.1@4779.92,4209.25
  Bottom Layer w5: v1(2997,2741) 3020,2741 3052.25,2773.25 3052.25,2830.25 v1(3239,3017) ; v1(3022.26,4358.37) 4595.63,4358.37 4714,4240 v1(4714,4209.25)
LCD_BL: P2.34 R12.2 STM32F4XX.36 | length 5854.7
  Top Layer w5: R12.2@3787.52,3658.98 3816,3658.98 3816,4224 3840,4248 3880,4248 3907,4221 v1(3907,4075) ; STM32F4XX.36@4108.12,2795.85 4157.47,2746.5 4212.9,2746.5 4224.13,2735.27 4224.13,2654.13 4130,2560 4130,2499.5 v1(4120,2489.5) ; P2.34@5295,2360 5332.03,2397.03 5332.03,2484.97 5320,2497 5305.63,2497 5257,2545.63 5257,3797 5270,3810 v1(5348,3810)
  Bottom Layer w5: v1(3907,4075) 5323,4075 5348,4050 v1(5348,3810) ; v1(4120,2489.5) 4133.25,2476.25 4285.36,2476.25 4401.61,2360 5087,2360 5137,2310 5285,2310 5295,2320 P2.34@5295,2360
NetC8_2: C8.2 STM32F4XX.12 Y2.2 | length 1262.8
  Top Layer w5: Y2.2@3145,2728.98 3184.02,2768 3333.38,2768 3401,2700.38 3401,2554 3525.91,2429.09 ; C8.2@3525.91,2332.48 3525.91,2429.09 ; v1(3529,2753) 3502,2726 3502,2569 3525.91,2545.09 3525.91,2429.09 ; v1(3612.33,2758) STM32F4XX.12@3691.93,2837.6
  Bottom Layer w5: v1(3529,2753) 3607.33,2753 v1(3612.33,2758)
NetC9_2: C9.2 STM32F4XX.13 Y2.1 | length 1474.5
  Top Layer w5: Y2.1@3145,2851.02 3091.91,2797.93 3091.91,2693.36 3165.81,2619.46 3197.52,2619.46 3312,2504.98 v1(3312,2415) ; C9.2@3668,2332.37 3668,2397 v1(3650,2415) 3593.5,2471.5 3593.5,2653.67 3669.83,2730 3669.83,2778.78 3705.85,2814.81 STM32F4XX.13@3705.85,2823.69
  Bottom Layer w5: v1(3312,2415) v1(3650,2415)
NetC10_1: C10.1 C11.1 R11.2 STM32F4XX.20 | length 3330.8
  Top Layer w5: C10.1@3078.86,2399.13 3198.87,2399.13 ; v1(3178,2420) 3198.87,2399.13 ; R11.2@3610.35,3658.98 3559.02,3658.98 3521,3697 3400,3697 3346.5,3643.5 3346.5,3509.35 3305.02,3467.87 3305.02,3174.02 3081.91,2950.91 3081.91,2683.36 3252.26,2513 3273,2513 3274,2512 3274,2405 3268.13,2399.13 C11.1@3236.34,2399.13 3198.87,2399.13 ; v1(3701,2510) 3701,2520 3760,2579 3800,2579 3820,2599 3820,2635 3787,2668 3787,2709.96 STM32F4XX.20@3803.29,2726.25
  Bottom Layer w5: v1(3178,2420) 3058,2420 3008.5,2469.5 3008.5,2595 3020,2606.5 3063.5,2606.5 3103.5,2566.5 3644.5,2566.5 v1(3701,2510)
NetD1_1: D1.1 R2.1 | length 1917.5
  Top Layer w5: R2.1@3334.76,3855.83 3410.83,3855.83 3469,3914 3469,4112.13 3510,4153.13 3510,4321 3541.62,4352.62 4225.44,4352.62 4232,4346.05 4232,4169 4421.37,3979.63 4456.42,3979.63 4501.48,3934.57 D1.1@4555.24,3934.57
NetD2_2: D2.2 R6.1 | length 1729
  Top Layer w5: R6.1@4043.43,3855.83 4043.43,3866 4080.45,3903.03 4080.45,3969.63 4032,4018.08 4032,4330 4044.62,4342.62 4196.38,4342.62 4213,4326 4213,4165 4408.37,3969.63 4434.78,3969.63 4525,3879.41 D2.2@4525,3444.37
NetD3_2: D3.2 R7.1 | length 556.1
  Top Layer w5: R7.1@4220.59,3855.83 4220.59,3830.77 4252.88,3798.47 4252.88,3677.21 4260,3670.09 4260,3464.37 4280,3444.37 D3.2@4400,3444.37
NetP3_27: P3.27 R14.2 | length 1281.4
  Top Layer w5: R14.2@3448.28,1762.74 3448.28,1694.72 3583,1560 3583,1400 3605,1378 4383,1378 P3.27@4421,1416
NetP3_28: P3.28 Q1.1 R13.1 R15.2 | length 2725.1
  Top Layer w5: v1(3434,2752) 3437,2749 3437,2712.13 Q1.1@3447.95,2712.13 ; v1(3709,2581) 3708,2581 3708,2570 3668.5,2530.5 3668.5,2482.5 3783,2368 3840,2368 3850,2358 v1(3850,2150) ; v1(3723,1916) 3723,1905.89 3828.89,1800 R13.1@3828.89,1763.65 3828.89,1733.11 3860,1702 3923,1702 4019,1798 4132.91,1798 R15.2@4132.91,1760.74 4132.91,1596 4134.91,1594 4510.19,1594 4559,1545.19 4559,1500 4537,1478 4459,1478 P3.28@4421,1516
  Bottom Layer w5: v1(3434,2752) 3434,2678.5 3505,2607.5 3682.5,2607.5 v1(3709,2581) ; v1(3723,1916) 3850,2043 v1(3850,2150)
NetP4_5: P4.5@2660,1850 R4.2 | length 3729.9
  Top Layer w5: v1(3532,4090) 3651,3971 3651,3940 R4.2@3689.09,3934.57
  Bottom Layer w5: P4.5@2660,1850 2599,1911 2460,1911 2419,1952 2419,3912 2440,3933 2523,3933 2544,3912 3020,3912 3074,3858 3121,3858 3198,3935 3377,3935 v1(3532,4090)
NetP4_6: P4.6@2560,1850 R5.1 | length 4357.7
  Top Layer w5: P4.6@2560,1850 2479,1850 2429,1900 2429,3969 2454,3994 2800,3994 2832,3962 v1(2832,3690) ; R5.1@3866.26,3855.83 3866.26,3766.74 3894,3739 v1(3894,3556)
  Bottom Layer w5: v1(2832,3690) 2843,3679 3455.5,3679 3467,3690.5 3759.5,3690.5 v1(3894,3556)
NetQ1_2: Q1.2 R12.1 R13.2 | length 3762.5
  Top Layer w5: v1(3137,2166) 3345,2374 3345,2620 3280,2685 3119.91,2685 3101.91,2703 3101.91,2760.91 3134,2793 3230,2793 ; Q1.2@3447.95,2637.32 3471.32,2637.32 3479,2645 3479,2765 3451,2793 3230,2793 ; v1(3489.5,1945.5) 3501.75,1957.75 3755.88,1957.75 3907.63,1806 R13.2@3907.63,1763.65 ; v1(3530,3628) 3530,3480 3467.02,3417.02 3340,3417.02 3315.02,3392.04 3315.02,3164.52 3195.81,3045.31 3195.81,2827.19 3230,2793 ; v1(3699,3623) 3709,3613 3787.52,3613 R12.1@3787.52,3580.24
  Bottom Layer w5: v1(3137,2166) 3269,2166 v1(3489.5,1945.5) ; v1(3530,3628) 3535,3623 v1(3699,3623)
NetR8_1: R8.1 S2.1 | length 2015
  Top Layer w5: S2.1@3244.49,4209.25 3298.25,4209.25 3452,4363 4284,4363 4307,4340 4307,4200 v1(4511,3996) ; R8.1@4397.76,3855.83 4397.76,3790.24 v1(4464,3724)
  Bottom Layer w5: v1(4464,3724) 4511,3771 v1(4511,3996)
NetR10_2: R10.2 STM32F4XX.21 | length 1386
  Top Layer w5: R10.2@3433.19,3658.98 3480,3658.98 3497,3641.98 v1(3497,3493) ; STM32F4XX.21@3817.21,2712.33 3843,2738.12 3843,2774 3864,2795 3864,2852 3894,2882 3894,3315 3882,3327 v1(3882,3342)
  Bottom Layer w5: v1(3497,3493) 3497,3404 3540,3361 3863,3361 v1(3882,3342)
NetR23_1: FLASH.6 R23.1 | length 3577.8
  Top Layer w5: v1(2935,2153) 2959,2177 2959,2363 2915,2407 2915,3323 3011,3419 3011,3732 v1(2998,3745) ; v1(3193,2095) FLASH.6@3267.28,2095 ; v1(4288,3717) 4281,3710 4281,3580.24 R23.1@4319.02,3580.24
  Bottom Layer w5: v1(2935,2153) 2959.26,2128.74 3159.26,2128.74 v1(3193,2095) ; v1(2998,3745) 3012.5,3730.5 3955.5,3730.5 4020,3795 4049,3795 4064,3780 4064,3740 4087,3717 v1(4288,3717)
NetR24_2: R24.2 USB.1 | length 505
  Top Layer w5: R24.2@4624.37,1657 4880,1657 4913.82,1623.18 USB.1@4913.82,1421.61
NetR25_2: R25.2 USB.2 | length 753.7
  Top Layer w5: R25.2@4367,1656 4439,1656 4475.03,1619.97 4520.03,1619.97 4579,1561 4659,1561 4736,1484 4736,1427 4780.38,1382.62 4932.03,1382.62 4939.41,1390 USB.2@4939.41,1421.61
NetR26_2: R26.2 R27.2 USB.3 | length 1040.9
  Top Layer w5: v1(4369.37,1801.37) R27.2@4369.37,1862 ; v1(4627.37,1801) R26.2@4627.37,1863 4762,1863 4965,1660 USB.3@4965,1421.61
  Bottom Layer w5: v1(4369.37,1801.37) 4627,1801.37 v1(4627.37,1801)
PA0/WK_UP: P2.23 S2.2 STM32F4XX.23 | length 5589.6
  Top Layer w5: S2.2@3244.49,4272.24 3312.24,4272.24 3417,4377 4976,4377 5233,4120 5233,3640 5190,3597 5170,3597 5157,3584 5157,2898 P2.23@5195,2860 ; STM32F4XX.23@3845.04,2684.49 3845.04,2693.37 3867,2715.32 3867,2764 v1(3897,2794)
  Bottom Layer w5: v1(3897,2794) 3897,2874.5 3988.44,2965.94 4314.44,2965.94 4328.5,2980 4328.5,3100 4337,3108.5 4347.5,3108.5 4350.5,3111.5 4442,3111.5 4587.56,2965.94 5110.06,2965.94 5154,2922 5311,2922 5333,2900 5333,2830 5323,2820 5235,2820 P2.23@5195,2860
PA1: P2.24 STM32F4XX.24 | length 1881.1
  Top Layer w5: STM32F4XX.24@3858.96,2670.57 3858.96,2679.45 3878.05,2698.53 3878.05,2740 3898.55,2760.5 3935.5,2760.5 v1(3949,2774)
  Bottom Layer w5: v1(3949,2774) 3949,2853.24 3985,2889.24 4031.24,2889.24 4087.94,2945.94 4344.44,2945.94 4348.5,2950 4348.5,3080 4357,3088.5 4365,3088.5 4368,3091.5 4422,3091.5 4634,2879.5 5150.5,2879.5 5178,2907 5248,2907 P2.24@5295,2860
PA2: P2.25 STM32F4XX.25 | length 1767.4
  Top Layer w5: STM32F4XX.25@3872.88,2656.65 3872.88,2665.53 3914,2706.65 v1(3914,2728)
  Bottom Layer w5: v1(3914,2728) 3981.4,2728 3995,2741.6 3995,2820.94 4110,2935.94 4350,2935.94 4358.5,2944.44 4358.5,3070 4378,3081.5 4412,3081.5 4733.5,2760 P2.25@5195,2760
PA3: P2.26 STM32F4XX.26 | length 1639.8
  Top Layer w5: STM32F4XX.26@3968.93,2656.65 3968.93,2627.07 v1(3998,2598)
  Bottom Layer w5: v1(3998,2598) 4007.22,2607.22 4944.19,2607.22 4951.45,2614.48 5009,2614.48 5016.45,2607.03 5340,2607.03 5366,2633.03 5366,2730 5336,2760 P2.26@5295,2760